# Altium PCB PMU_v1.0.PcbDoc
Units mm, origin at the board's own origin, x right, y up, seen from the top; angles counter-clockwise.
Board outline 68.5 x 112 mm, 2 copper layers (Top Layer, Bottom Layer), stack 1.571 mm thick; 8 components, 8 nets, 8 pads, 0 vias.
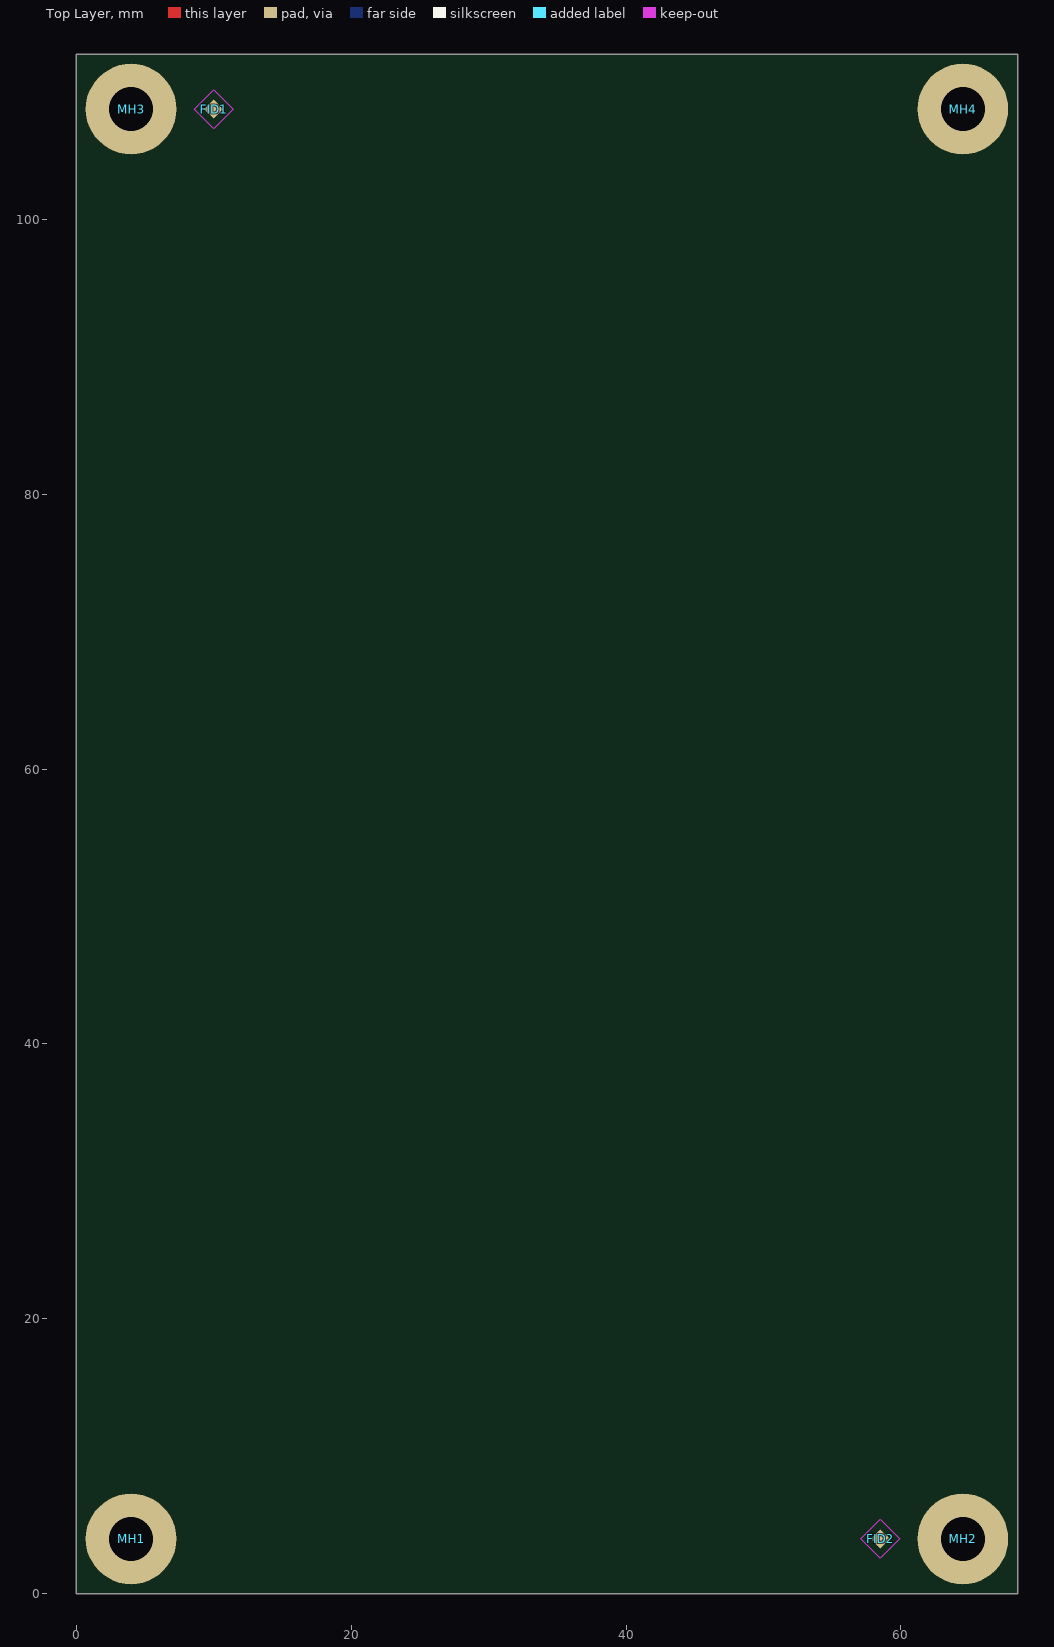
[diagram p0: Top Layer view]
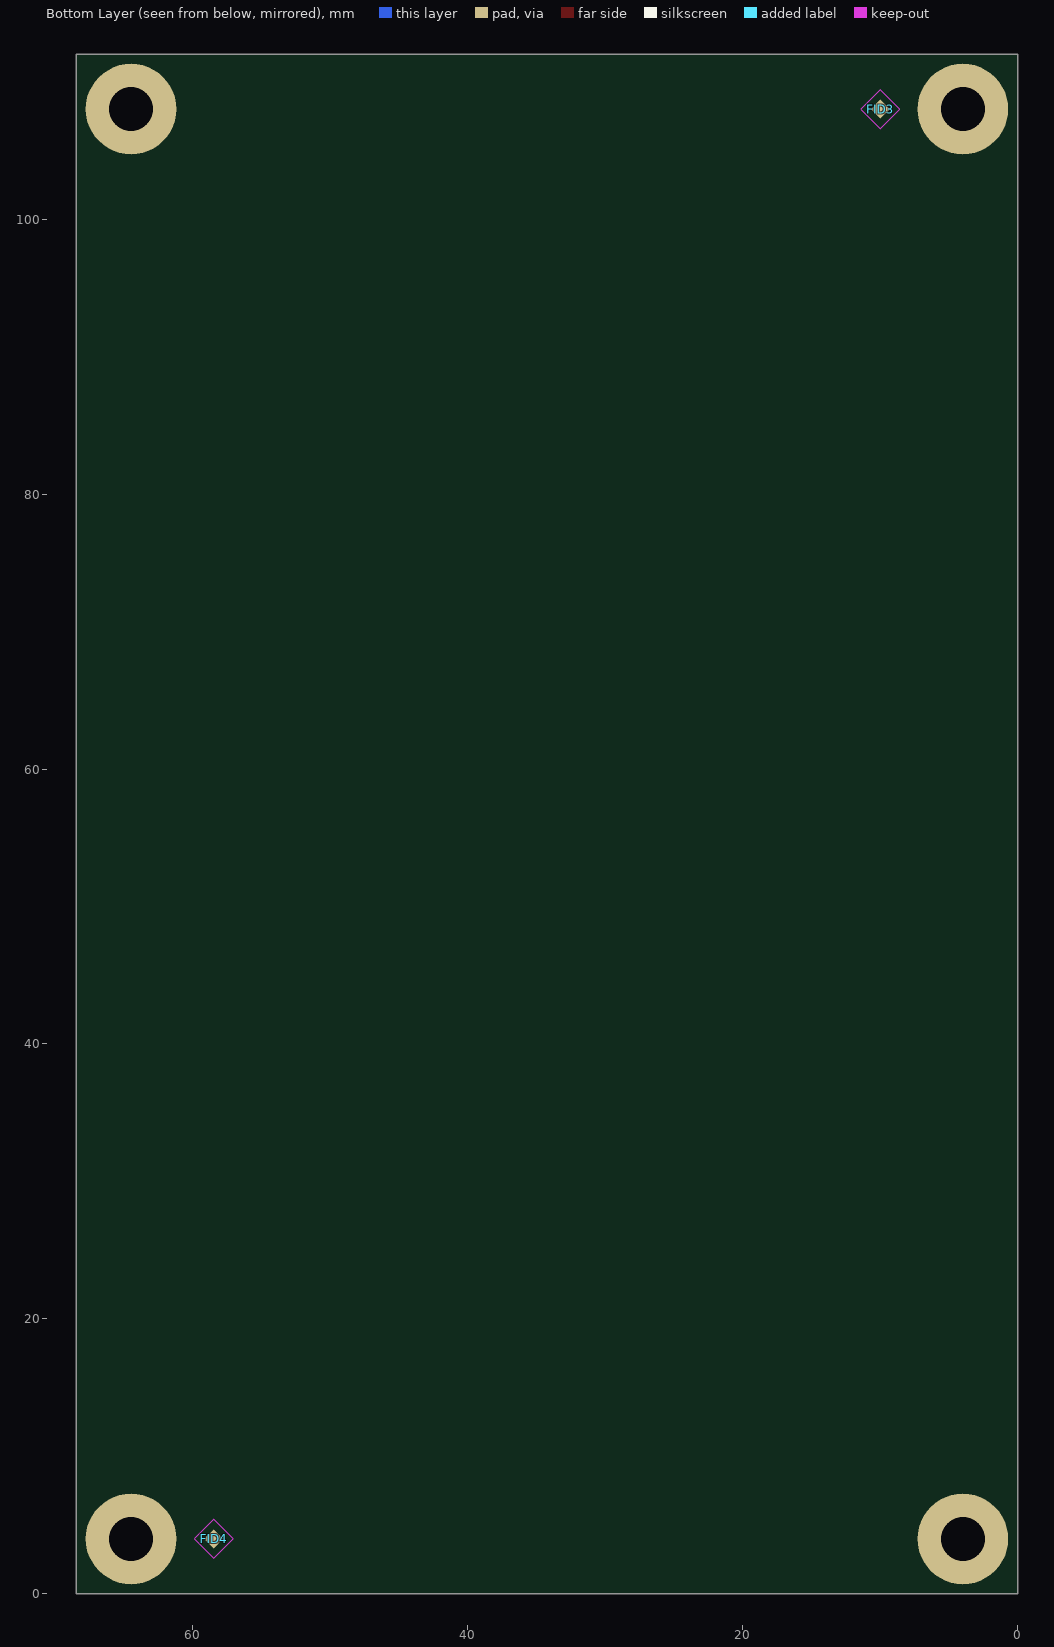
[diagram p1: Bottom Layer view, seen from below]

## Layer stack, top to bottom
Top Solder: solder mask 0.0102, Solder Resist, Dk 3.5
Top Layer: signal copper 0.0356
Dielectric 1: core 1.5, FR-4, Dk 4.2
Bottom Layer: signal copper 0.0356
Bottom Solder: solder mask 0.0102, Solder Resist, Dk 3.5

## Board outline
0,0 68.5,0 68.5,112 0,112

## Design rules (kind name [scope] priority, off if disabled: settings)
Clearance [All] p1: gap=0.254 ignorepadtopadclearanceinfootprint=FALSE except(0: Arc-Hole Track-Hole SMDPad-Hole THPad-Hole Via-Hole Fill-Hole Poly-Hole Region-Hole Text-Hole)
HoleSize [All] p1: absolutevalues=TRUE maxlimit=5 minlimit=0.025 maxpercent=80.000 minpercent=20.000
PolygonConnect [All] p1: connectstyle=Relief reliefconductorwidth=0.254 reliefentries=4 polygonreliefangle="90 Angle" airgapwidth=0.254
RoutingVias [All] p1: holewidth=0.711 width=1.27 viastyle="Through Hole" minholewidth=0.711 minwidth=1.27 maxholewidth=0.711 maxwidth=1.27
SolderMaskExpansion [All] p1: expansion=0.102
Width [All] p1: maxlimit=1.016 minlimit=0.102 preferedwidth=0.203
29 further rules are at their usual default settings.

## Classes and differential pairs
net class Isolated: GND P5V0_Relay
net class PWR: OUTPUT+ OUTPUT- SENSE+ SENSE- SENSE_TERMINAL+ SENSE_TERMINAL-
component class Teho_FP_TermBoard: J1 J2 J3 J4

## Components (designator, comment, footprint, x,y, rotation, side; value= is the part's Value field where it differs from the comment)
FID1 "Fiducial Top Layer" FIDUCIAL_TOP_S100-200 10,108 r180 top
FID2 "Fiducial Top Layer" FIDUCIAL_TOP_S100-200 58.5,4 r180 top
FID3 "Fiducial Bot Layer" FIDUCIAL_BOT_S100-200 10,108 r180 top
FID4 "Fiducial Bot Layer" FIDUCIAL_BOT_S100-200 58.5,4 r180 top
MH1 "M3 Mounting hole" MH-M3_COPPER 4,4 r180 top
MH2 "M3 Mounting hole" MH-M3_COPPER 64.5,4 r180 top
MH3 "M3 Mounting hole" MH-M3_COPPER 4,108 r180 top
MH4 "M3 Mounting hole" MH-M3_COPPER 64.5,108 r180 top

## Footprints (in the part's own frame and the unit in brackets; to place one, negate y for a bottom-side part, rotate by r counter-clockwise, add the part's x,y. Pads: shape width x height; smd on the part's side, far side on the other; paste and mask are expansions set on the pad)
FIDUCIAL_BOT_S100-200 [mm] "Square Fiducial Target, Bot Layer, 1.0mm, Bot Solder 2.0mm, Keepout =2.0mm"
  rect 1x1 smd far side rot 45 paste-0.51 mask+0.5: 1(0,0)
  Bottom Layer keep-out region: 1.414,0 0,-1.414 -1.414,0 0,1.414
FIDUCIAL_TOP_S100-200 [mm] "Square Fiducial Target, Top Layer, 1.0mm, Top Solder 2.0mm, Keepout =2.0mm"
  rect 1x1 smd rot 45 paste-0.51 mask+0.5: 1(0,0)
  Top Layer keep-out region: 1.414,0 0,-1.414 -1.414,0 0,1.414
MH-M3_COPPER [mm] "M3 screw Mounting Hole with copper without washer"
  round 6.6 hole 3.2 mask+1.8: MH(0,0)

## Part data
FID1 FID2: library part FIDUCIAL_TOP_S100-200
FID3 FID4: library part FIDUCIAL_BOT_S100-200
MH1 MH2 MH3 MH4: library part MH-M3_C

## Nets (pads, with @x,y where several pads share a name; then routed paths per layer and width w, separated by ;. In a path a pad name is that pad's centre, name@x,y a point inside that pad or via, vN(x,y) a via of type N, cw(c..) or ccw(c..) an arc to the next point about the centre after c; other vN are vias at no path point)
GND: 
OUTPUT+: 
OUTPUT-: 
P5V0_Relay: 
SENSE+: 
SENSE-: 
SENSE_TERMINAL+: 
SENSE_TERMINAL-: 
pads on no net: FID1.1 FID2.1 FID3.1 FID4.1 MH1.MH MH2.MH MH3.MH MH4.MH

## Other copper
Top Layer:
  text "'.Layer_Name'" at 19.198,116.684 h2
Bottom Layer:
  text "'.Layer_Name'" at 19.198,116.684 h2

## Silkscreen, mask and mechanical layers (free items; w line width, h text height)
Top Overlay:
  text "'.Layer_Name'" at 19.198,116.684 h2
Bottom Overlay:
  text "'.Layer_Name'" at 19.198,116.684 h2
PCB Outline:
  the board outline again, w0.2
  text "'.Layer_Name'" at 19.198,116.684 h2
PCB Dimension:
  text "'.Layer_Name'" at 19.198,116.684 h2
Stackup:
  drawing of 191 lines, arcs and shapes, not listed
  text "Layer" at 198.714,92.288 h1.52
  text "Name" at 209.126,92.288 h1.52
  text "Material" at 232.742,92.288 h1.52
  text "Thickness" at 254.58,92.288 h1.52
  text "Constant" at 271.086,92.288 h1.52
  text "Board Layer Stack" at 285.56,92.288 h1.52
  text "1" at 198.714,89.24 h1.52
  text "Top Overlay" at 209.126,89.24 h1.52
  text "2" at 198.714,86.192 h1.52
  text "Top Solder" at 209.126,86.192 h1.52
  text "Solder Resist" at 232.742,86.192 h1.52
  text "0.010mm" at 254.58,86.192 h1.52
  text "3.5" at 271.086,86.192 h1.52
  text "3" at 198.714,83.144 h1.52
  text "Top Layer" at 209.126,83.144 h1.52
  text "Copper" at 232.742,83.144 h1.52
  text "0.036mm" at 254.58,83.144 h1.52
  text "4" at 198.714,80.096 h1.52
  text "Dielectric 1" at 209.126,80.096 h1.52
  text "FR-4" at 232.742,80.096 h1.52
  text "1.500mm" at 254.58,80.096 h1.52
  text "4.2" at 271.086,80.096 h1.52
  text "5" at 198.714,77.048 h1.52
  text "Bottom Layer" at 209.126,77.048 h1.52
  text "Copper" at 232.742,77.048 h1.52
  text "0.036mm" at 254.58,77.048 h1.52
  text "6" at 198.714,74 h1.52
  text "Bottom Solder" at 209.126,74 h1.52
  text "Solder Resist" at 232.742,74 h1.52
  text "0.010mm" at 254.58,74 h1.52
  text "3.5" at 271.086,74 h1.52
  text "7" at 198.714,70.952 h1.52
  text "Bottom Overlay" at 209.126,70.952 h1.52
Information:
  lines w0.051: -107.382,-22.066 -102.382,-22.066 ; -107.382,11.268 -102.382,11.268 ; -107.382,44.601 -102.382,44.601 ; -107.382,77.934 -102.382,77.934 ; -107.382,111.268 -102.382,111.268 ; -69.132,-60.399 -69.132,-55.399 ; -69.132,144.601 -69.132,149.601 ; -30.632,-60.399 -30.632,-55.399 ; -30.632,144.601 -30.632,149.601 ; 7.868,-60.399 7.868,-55.399 ; 7.868,144.601 7.868,149.601 ; 41.118,-60.399 41.118,-55.399 ; 41.118,144.601 41.118,149.601 ; 79.618,-60.399 79.618,-55.399 79.618,-19.149 184.618,-19.149 ; 79.618,-35.899 134.118,-35.899 ; 79.618,144.601 79.618,149.601 ; 112.618,-60.399 112.618,-55.399 ; 112.618,144.601 112.618,149.601 ; 134.118,-55.399 134.118,-35.899 ; 134.118,-45.649 184.618,-45.649 ; 134.118,-19.149 134.118,-35.899 ; 151.118,-60.399 151.118,-55.399 ; 151.118,144.601 151.118,149.601 ; 159.368,-55.399 159.368,-45.649 ; 184.618,-35.899 134.118,-35.899 ; 184.618,-22.066 189.618,-22.066 ; 184.618,11.268 189.618,11.268 ; 184.618,44.601 189.618,44.601 ; 184.618,77.934 189.618,77.934 ; 184.618,111.268 189.618,111.268 ; -107.382,-60.399 189.618,-60.399 189.618,149.601 -107.382,149.601 -107.382,-60.399 ; -102.382,-55.399 184.618,-55.399 184.618,144.601 -102.382,144.601 -102.382,-55.399
  lines w0.102: 77.2,-55.319 77.2,-17.8 184.591,-17.8 ; -99.9,96.6 -34.8,96.6 -34.8,143.2 -99.9,143.2 -99.9,96.6
  text "1" at -85.483,146.101 h2
  text "2" at -52.233,146.101 h2
  text "3" at -13.733,146.101 h2
  text "4" at 24.767,146.101 h2
  text "5" at 58.017,146.101 h2
  text "6" at 96.517,146.101 h2
  text "7" at 129.517,146.101 h2
  text "8" at 168.017,146.101 h2
  text "NOTES:" at -97.882,136.851 h3
  text "1. MATERIAL:FR4" at -97.882,131.351 h2
  text "A" at -105.549,128.209 h2
  text "A" at 186.701,128.209 h2
  text "2. TOP SOLDER: Yes/Green" at -97.882,126.301 h2
  text "3. BOTTOM SOLDER: Yes/Green" at -97.882,121.251 h2
  text "4. TOP SILKSCREEN: Yes/White" at -97.882,116.201 h2
  text "5. BOTTOM SILKSCREEN: Yes/White" at -97.882,111.151 h2
  text "6. COPPER: 35um, FINISH: ENIG" at -97.882,106.101 h2
  text "7. TOTAL THICKNESS:  1.55mm" at -97.882,101.051 h2
  text "B" at -105.799,94.876 h2
  text "B" at 186.451,94.876 h2
  text "Basic technological information" at -99.7,93.3 h2
  text "C" at -105.549,61.542 h2
  text "C" at 186.701,61.542 h2
  text "D" at -105.549,28.209 h2
  text "D" at 186.701,28.209 h2
  text "E" at -105.549,-5.124 h2
  text "E" at 186.701,-5.124 h2
  text "UNLESS OTHERWISE SPECIFIED:" at 82.118,-21.774 h2.2
  text "ALL DIMENSIONS ARE IN  MILIMETERS" at 82.116,-23.774 h2.2
  text "PROJECT NAME" at 138.368,-25.649 h2
  text "TOLERANCES ON:" at 82.118,-26.274 h2.2
  text "LINEAR DIMENSIONS" at 82.118,-28.149 h2.2
  text "DRILL:" at 110.068,-28.149 h2.2
  text ".XXX       =   +/- 0.050" at 82.118,-30.024 h2.2
  text "+/- 0.100" at 110.068,-30.024 h2.2
  text "(Enter prj. name)" at 138.368,-30.149 h2.5
  text ".XX         =   +/- 0.100" at 82.118,-31.899 h2.2
  text ".X           =   +/- 0.200" at 82.118,-33.774 h2.2
  text "F" at -105.549,-38.458 h2
  text "F" at 186.701,-38.458 h2
  text "PROJECT DATE" at 138.368,-39.149 h2
  text "TechOcean Sp. z o.o." at 82.368,-40.399 h2.5
  text "'.Print_Date'" at 138.368,-43.649 h2.5
  text "DOMANIEWSKA 37A/119" at 82.368,-44.649 h2.5
  text "02-672 WARSZAWA" at 82.368,-48.899 h2.5
  text "SIZE" at 142.118,-49.649 h2
  text "REV." at 168.868,-49.649 h2
  text "POLAND" at 82.368,-53.149 h2.5
  text "A4" at 142.118,-54.149 h2.5
  text "1.0" at 166.243,-54.449 h2.5
  text "1" at -85.483,-58.899 h2
  text "2" at -52.233,-58.899 h2
  text "3" at -13.733,-58.899 h2
  text "4" at 24.767,-58.899 h2
  text "5" at 58.017,-58.899 h2
  text "6" at 96.517,-58.899 h2
  text "7" at 129.517,-58.899 h2
  text "8" at 168.017,-58.899 h2
Drill Drawing:
  circle w0.254: c199.556,35.99 r0.847
  lines w0.381: 197.19,34.001 388.959,34.001 ; 197.19,37.811 388.959,37.811 ; 211.183,30.191 211.183,41.621 ; 223.372,30.191 223.372,41.621 ; 252.573,30.191 252.573,41.621 ; 265.422,30.191 265.422,41.621 ; 284.061,30.191 284.061,41.621 ; 322.15,30.191 322.15,41.621 ; 337.132,30.191 337.132,41.621 ; 356.075,30.191 356.075,41.621 ; 197.19,30.191 388.959,30.191 388.959,41.621 197.19,41.621 197.19,30.191
  text "Symbol" at 199.476,38.954 h1.83
  text "Count" at 212.326,38.954 h1.83
  text "Hole Size" at 224.515,38.954 h1.83
  text "Plated" at 253.716,38.954 h1.83
  text "Hole Type" at 266.565,38.954 h1.83
  text "Drill Layer Pair" at 285.204,38.954 h1.83
  text "Via/Pad" at 323.293,38.954 h1.83
  text "Pad Shape" at 338.275,38.954 h1.83
  text "Template" at 357.218,38.954 h1.83
  text "4" at 212.326,35.144 h1.52
  text "3.200mm (125.98mil)" at 224.515,35.144 h1.52
  text "PTH" at 253.716,35.144 h1.52
  text "Round" at 266.565,35.144 h1.52
  text "Top Layer - Bottom Layer" at 285.204,35.144 h1.52
  text "Pad" at 323.293,35.144 h1.52
  text "Rounded" at 338.275,35.144 h1.52
  text "c660h320m500(Tol5-5)" at 357.218,35.144 h1.52
  text "4 Total" at 212.326,31.334 h1.52

## Dimensions
68.5,0 to 68.5,112 on PCB Dimension
0,0 to 68.5,0 on PCB Dimension